# Altium PCB DMM6500 Scan card.PcbDoc (part 1 of 2)
Units mm, origin at the board's own origin, x right, y up, seen from the top; angles counter-clockwise.
Board outline 228.6 x 72.14 mm, 2 copper layers (Top Layer, Bottom Layer); 208 components, 132 nets, 652 pads, 172 vias.
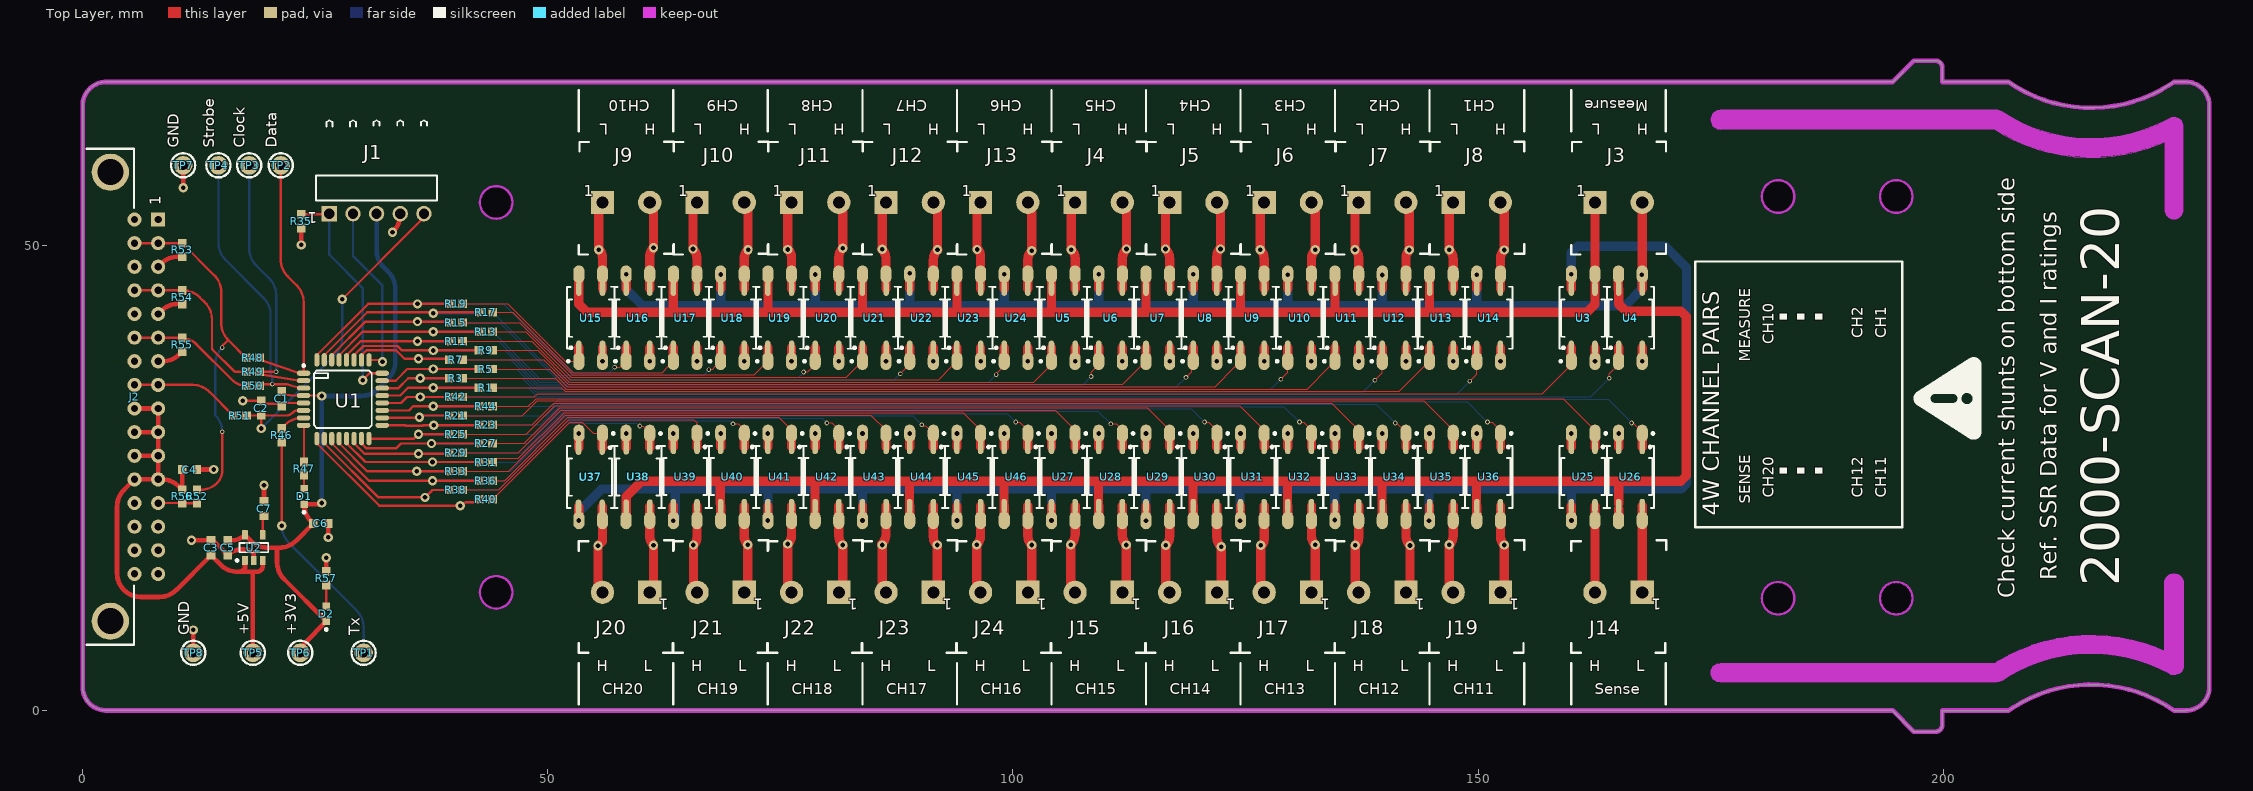
[diagram p0: Top Layer view]
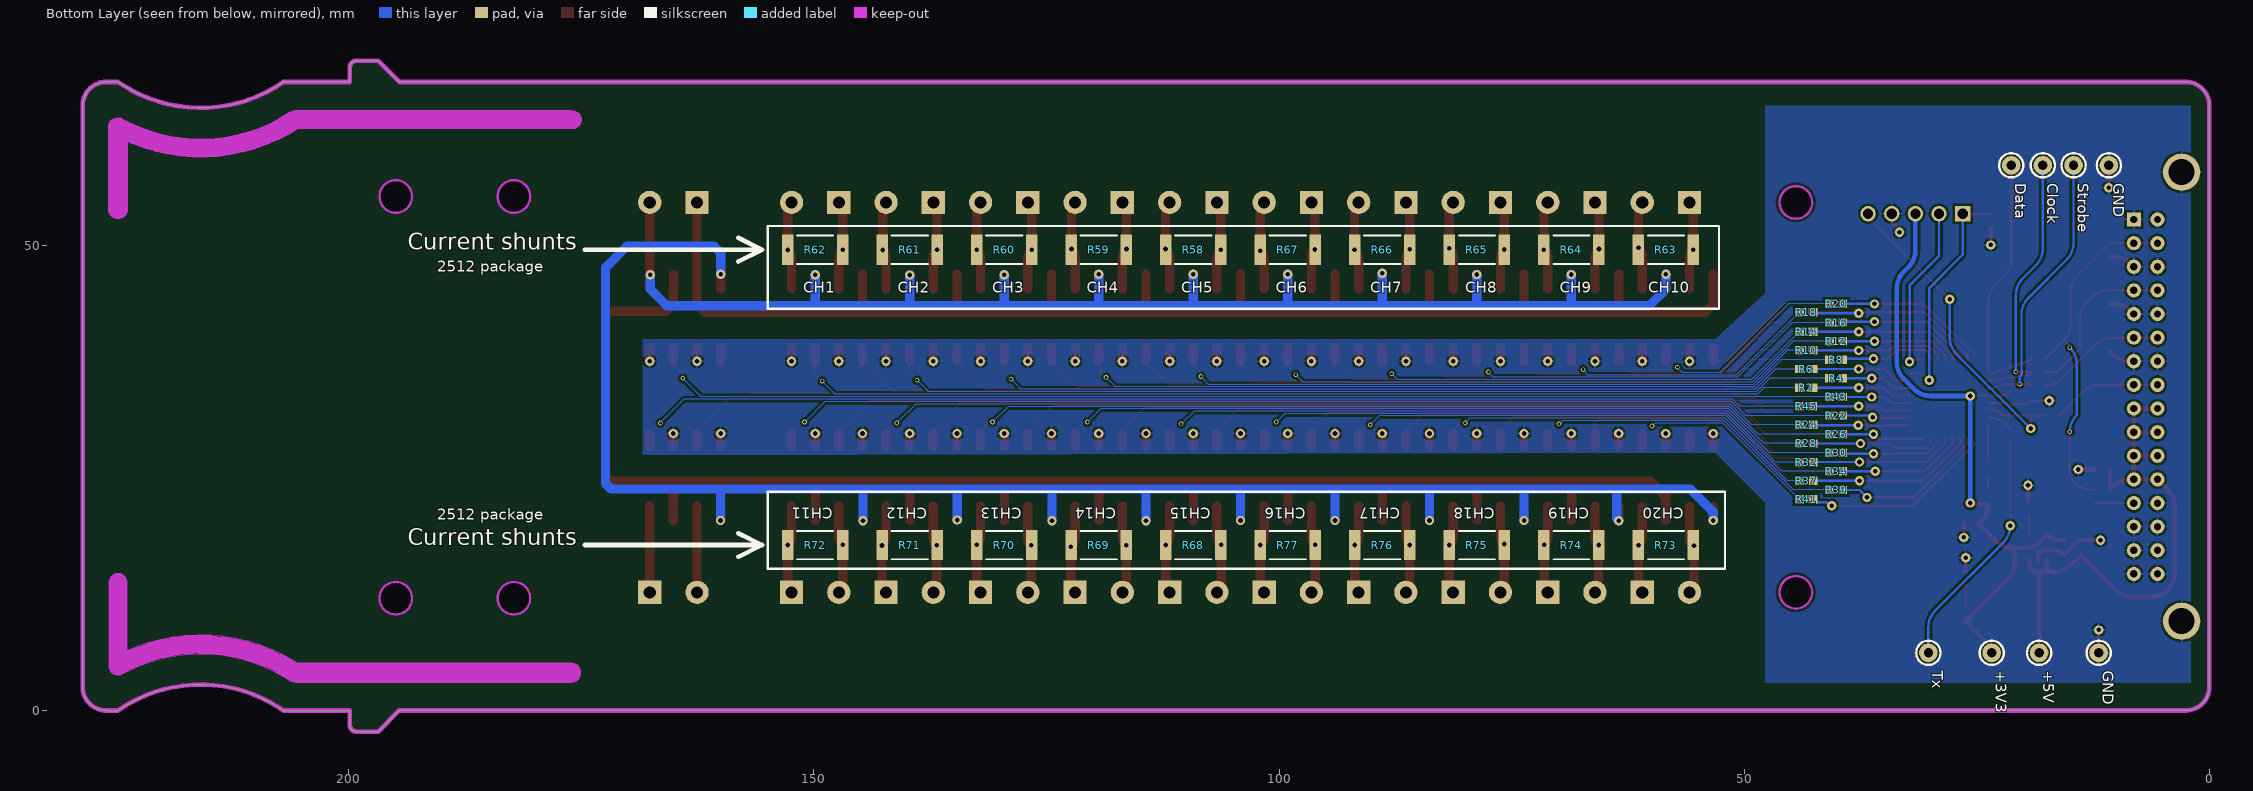
[diagram p1: Bottom Layer view, seen from below]

## Layer stack, top to bottom
Top Solder: solder mask 0.0102, Solder Resist, Dk 3.5
Top Layer: signal copper 0.0356
Dielectric 1: dielectric 0.32, FR-4, Dk 4.8
Bottom Layer: signal copper 0.0356
Bottom Solder: solder mask 0.0102, Solder Resist, Dk 3.5

## Board outline
1.12,0.434 1.27,0.34 1.427,0.257 1.588,0.185 1.755,0.124 1.926,0.075 2.099,0.039 2.274,0.014 2.451,0.002 2.54,0 194.564,0 196.85,-2.286 199.136,-2.286 199.189,-2.284 199.242,-2.279 199.294,-2.269 199.346,-2.256 199.397,-2.24 199.446,-2.22 199.494,-2.197 199.54,-2.17 199.584,-2.14 199.626,-2.108 199.665,-2.072 199.702,-2.034 199.736,-1.993 199.768,-1.95 199.796,-1.905 199.821,-1.858 199.843,-1.809 199.861,-1.759 199.875,-1.708 199.886,-1.656 199.894,-1.604 199.898,-1.551 199.898,-1.524 199.898,-0.009 207.02,-0.009 207.422,0.262 208.351,0.822 209.316,1.316 210.314,1.742 211.339,2.097 212.386,2.38 213.45,2.589 214.527,2.723 215.61,2.782 216.694,2.765 217.775,2.672 218.847,2.504 219.904,2.262 220.942,1.947 221.955,1.56 222.939,1.104 223.889,0.58 224.8,-0.009 226.07,-0.009 226.06,0 226.237,0.006 226.413,0.025 226.588,0.056 226.76,0.098 226.929,0.153 227.093,0.22 227.252,0.297 227.406,0.386 227.553,0.485 227.693,0.594 227.824,0.713 227.948,0.84 228.062,0.976 228.166,1.12 228.26,1.27 228.343,1.427 228.415,1.588 228.476,1.755 228.525,1.926 228.561,2.099 228.586,2.274 228.598,2.451 228.6,2.54 228.6,65.024 228.594,65.201 228.575,65.377 228.544,65.552 228.502,65.724 228.447,65.893 228.38,66.057 228.303,66.216 228.214,66.37 228.115,66.517 228.006,66.657 227.887,66.788 227.76,66.912 227.624,67.026 227.48,67.13 227.33,67.224 227.173,67.307 227.011,67.379 226.845,67.44 226.674,67.489 226.501,67.525 226.326,67.55 226.149,67.562 226.06,67.564 224.79,67.564 224.388,67.293 223.459,66.732 222.494,66.238 221.496,65.812 220.471,65.457 219.424,65.175 218.359,64.966 217.283,64.832 216.2,64.773 215.115,64.79 214.035,64.882 212.963,65.05 211.906,65.292 210.868,65.607 209.854,65.994 208.87,66.451 207.921,66.975 207.01,67.564 199.898,67.564 199.898,69.088 199.896,69.141 199.891,69.194 199.881,69.246 199.868,69.298 199.852,69.349 199.832,69.398 199.809,69.446 199.782,69.492 199.752,69.536 199.72,69.578 199.684,69.617 199.646,69.654 199.605,69.688 199.562,69.72 199.517,69.748 199.47,69.773 199.421,69.795 199.371,69.813 199.32,69.827 199.268,69.838 199.216,69.846 199.163,69.85 199.136,69.85 196.85,69.85 194.564,67.564 2.54,67.564 2.363,67.558 2.186,67.539 2.012,67.508 1.84,67.466 1.671,67.411 1.507,67.344 1.348,67.267 1.194,67.178 1.047,67.079 0.907,66.97 0.776,66.851 0.652,66.724 0.538,66.588 0.434,66.444 0.34,66.294 0.257,66.137 0.185,65.975 0.124,65.809 0.075,65.638 0.039,65.465 0.014,65.29 0.002,65.113 0,65.024 0,2.54 0.006,2.363 0.025,2.186 0.056,2.012 0.098,1.84 0.153,1.671 0.22,1.507 0.297,1.348 0.386,1.194 0.485,1.047 0.594,0.907 0.713,0.776 0.84,0.652 0.976,0.538
cut-out: 44.45,52.86 cw(c44.45,54.61) 42.7,54.61 cw(c44.45,54.61) 44.45,56.36 cw(c44.45,54.61) 46.2,54.61 cw(c44.45,54.61)
cut-out: 193.195,55.245 ccw(c194.945,55.245) 194.945,53.495 ccw(c194.945,55.245) 196.695,55.245 ccw(c194.945,55.245) 194.945,56.995 ccw(c194.945,55.245)
cut-out: 180.495,55.245 ccw(c182.245,55.245) 182.245,53.495 ccw(c182.245,55.245) 183.995,55.245 ccw(c182.245,55.245) 182.245,56.995 ccw(c182.245,55.245)
cut-out: 180.495,12.065 ccw(c182.245,12.065) 182.245,10.315 ccw(c182.245,12.065) 183.995,12.065 ccw(c182.245,12.065) 182.245,13.815 ccw(c182.245,12.065)
cut-out: 193.195,12.065 ccw(c194.945,12.065) 194.945,10.315 ccw(c194.945,12.065) 196.695,12.065 ccw(c194.945,12.065) 194.945,13.815 ccw(c194.945,12.065)
cut-out: 42.7,12.7 ccw(c44.45,12.7) 44.45,10.95 ccw(c44.45,12.7) 46.2,12.7 ccw(c44.45,12.7) 44.45,14.45 ccw(c44.45,12.7)
cut-out: 208.83,60.784 210.04,60.357 210.11,60.335 211.346,59.993 211.417,59.977 212.676,59.722 212.746,59.71 214.02,59.543 214.091,59.537 215.375,59.459 215.444,59.458 216.731,59.47 216.801,59.473 218.083,59.575 218.152,59.583 219.424,59.774 219.493,59.787 220.748,60.067 220.817,60.085 222.048,60.451 222.115,60.473 223.32,60.925 223.385,60.952 223.79,61.137 223.79,53.848 ccw(c224.79,53.848) 225.79,53.848 225.79,62.738 ccw(c224.79,62.738) 224.324,63.623 223.698,63.294 222.584,62.786 221.445,62.359 220.279,62.012 219.092,61.748 217.889,61.567 216.676,61.47 215.46,61.459 214.246,61.532 213.04,61.689 211.847,61.931 210.675,62.255 209.528,62.66 208.412,63.144 207.332,63.704 206.265,64.357 ccw(c205.743,63.504) 205.742,64.504 176.022,64.5 ccw(c176.022,63.5) 176.022,62.5 205.461,62.503 206.318,61.979 206.379,61.945 207.52,61.352 207.584,61.322
cut-out: 176.031,3.054 cw(c176.032,4.054) 176.032,5.055 205.463,5.051 205.84,5.289 205.887,5.318 207.01,5.944 207.072,5.976 208.237,6.523 208.301,6.55 209.5,7.015 209.566,7.038 210.795,7.417 210.864,7.436 212.115,7.728 212.185,7.742 213.453,7.946 213.523,7.955 214.804,8.071 214.874,8.075 216.16,8.101 216.23,8.1 217.515,8.036 217.584,8.03 218.861,7.877 218.932,7.866 220.192,7.624 220.263,7.608 221.504,7.279 221.572,7.259 222.789,6.843 222.855,6.818 223.799,6.421 223.799,13.706 cw(c224.8,13.706) 225.8,13.706 225.8,4.816 cw(c224.8,4.816) 224.347,3.924 223.231,4.489 222.11,4.961 220.959,5.354 219.783,5.666 218.588,5.894 217.381,6.039 216.166,6.1 214.949,6.075 213.738,5.966 212.537,5.772 211.352,5.495 210.19,5.136 209.056,4.697 207.954,4.18 206.886,3.584 206.287,3.205 cw(c205.752,4.051) 205.752,3.05

## Design rules (kind name [scope] priority, off if disabled: settings)
Clearance [All] p1: gap=0.254 ignorepadtopadclearanceinfootprint=FALSE except(0.127: Arc-Arc Arc-Track Track-Track SMDPad-SMDPad; 0.2: Arc-SMDPad Track-SMDPad)
ComponentClearance ComponentClearance_Conn [(HasFootprint('Phoenix Contact 1733570')) vs (HasFootprint('Phoenix Contact 1733570'))] p1: gap=0 collisioncheckmode=3 verticalgap=0 showdistances=FALSE
ComponentClearance ComponentClearance_General [All] p2: gap=0.254 collisioncheckmode=3 verticalgap=0.254 showdistances=FALSE
HoleSize [All] p1: absolutevalues=TRUE maxlimit=5 minlimit=0.025 maxpercent=80.000 minpercent=20.000
MinimumSolderMaskSliver [All] p1: minsoldermaskwidth=0
PolygonConnect [All] p1: connectstyle=Relief reliefconductorwidth=0.254 reliefentries=4 polygonreliefangle="90 Angle" airgapwidth=0.254
RoutingVias [All] p1: holewidth=0.5 width=1 viastyle="Through Hole" minholewidth=0.3 minwidth=0.5 maxholewidth=0.7 maxwidth=1.27
SilkToSilkClearance [All] p1: silktosilkclearance=0
SilkToSolderMaskClearance [IsPad] p1: minsilkscreentomaskgap=0.1 clearancetoexposedcopper=TRUE
SolderMaskExpansion SolderMaskExpansionVias [IsVia] p1: expansion=0.102 istentingtop=TRUE
SolderMaskExpansion [All] p2: expansion=0.102 istentingtop=FALSE
Width [All] p1: maxlimit=1 minlimit=0.127 preferedwidth=0.254 minimp=50.000000 maximp=50.000000 favimp=50.000000
25 further rules are at their usual default settings.

## Classes and differential pairs
component class "Scan card SSR": J3 J4 J5 J6 J7 J8 J9 J10 J11 J12 J13 J14 J15 J16 J17 J18 J19 J20 J21 J22 J23 J24 R58 R59 R60 R61 R62 R63 R64 R65 R66 R67 R68 R69 R70 R71 R72 R73 R74 R75 R76 R77 U3 U4 U5 U6 U7 U8 U9 U10 U11 U12 U13 U14 U15 U16 U17 U18 U19 U20 U21 U22 U23 U24 U25 U26 U27 U28 U29 U30 U31 U32 U33 U34 U35 U36 U37 U38 U39 U40 U41 U42 U43 U44 U45 U46
component class "Scan card MCU&Power": C1 C2 C3 C4 C5 C6 C7 D1 D2 J1 J2 R1 R2 R3 R4 R5 R6 R7 R8 R9 R10 R11 R12 R13 R14 R15 R16 R17 R18 R19 R20 R21 R22 R23 R24 R25 R26 R27 R28 R29 R30 R31 R32 R33 R34 R35 R36 R37 R38 R39 R40 R41 R42 R43 R44 R45 R46 R47 R48 R49 R50 R51 R52 R53 R54 R55 R56 R57 TP1 TP2 TP3 TP4 TP5 TP6 TP7 TP8 U1 U2

## Components (designator, comment, footprint, x,y, rotation, side; value= is the part's Value field where it differs from the comment)
C1 "100n" CAPC1608X08N 21.4,33.5 r270 top
C2 "100n" CAPC1608X08N 19.2,32.5 r270 top
C3 "1u" CAPC1608X08N 13.8,17.5 r270 top
C4 "1u" CAPC1608X08N 11.5,25.9 r180 top
C5 "1u" CAPC1608X08N 15.6,17.5 r90 top
C6 "1u" CAPC1608X08N 25.6,20.1 r180 top
C7 "100n" CAPC1608X08N 19.5,21.7 r270 top
D1 "0603" LED0603green 23.8,23 r270 top
D2 "0603" LED0603red 26.2,10.4 r270 top
J1 "61300511021" "WE 61300511021" 31.6,56.17 r180 top
J2 "85050-0000" "Molex 85050-0000" 5.515,33.725 r90 top
J3 "1733570" "Phoenix Contact 1733570" 165.1,54.61 r0 top
J4 "1733570" "Phoenix Contact 1733570" 109.22,54.61 r0 top
J5 "1733570" "Phoenix Contact 1733570" 119.38,54.61 r0 top
J6 "1733570" "Phoenix Contact 1733570" 129.54,54.61 r0 top
J7 "1733570" "Phoenix Contact 1733570" 139.7,54.61 r0 top
J8 "1733570" "Phoenix Contact 1733570" 149.86,54.61 r0 top
J9 "1733570" "Phoenix Contact 1733570" 58.42,54.61 r0 top
J10 "1733570" "Phoenix Contact 1733570" 68.58,54.61 r0 top
J11 "1733570" "Phoenix Contact 1733570" 78.74,54.61 r0 top
J12 "1733570" "Phoenix Contact 1733570" 88.9,54.61 r0 top
J13 "1733570" "Phoenix Contact 1733570" 99.06,54.61 r0 top
J14 "1733570" "Phoenix Contact 1733570" 165.1,12.7 r180 top
J15 "1733570" "Phoenix Contact 1733570" 109.22,12.7 r180 top
J16 "1733570" "Phoenix Contact 1733570" 119.38,12.7 r180 top
J17 "1733570" "Phoenix Contact 1733570" 129.54,12.7 r180 top
J18 "1733570" "Phoenix Contact 1733570" 139.7,12.7 r180 top
J19 "1733570" "Phoenix Contact 1733570" 149.86,12.7 r180 top
J20 "1733570" "Phoenix Contact 1733570" 58.42,12.7 r180 top
J21 "1733570" "Phoenix Contact 1733570" 68.58,12.7 r180 top
J22 "1733570" "Phoenix Contact 1733570" 78.74,12.7 r180 top
J23 "1733570" "Phoenix Contact 1733570" 88.9,12.7 r180 top
J24 "1733570" "Phoenix Contact 1733570" 99.06,12.7 r180 top
R1 "330 1%" RESC1608X06N 43.325,34.7 r0 top
R2 "330 1%" RESC1608X06N 43.325,34.7 r0 bottom
R3 "330 1%" RESC1608X06N 40.125,35.7 r0 top
R4 "330 1%" RESC1608X06N 40.125,35.7 r0 bottom
R5 "330 1%" RESC1608X06N 43.325,36.7 r0 top
R6 "330 1%" RESC1608X06N 43.325,36.7 r0 bottom
R7 "330 1%" RESC1608X06N 40.125,37.7 r0 top
R8 "330 1%" RESC1608X06N 40.125,37.7 r0 bottom
R9 "330 1%" RESC1608X06N 43.325,38.7 r0 top
R10 "330 1%" RESC1608X06N 43.325,38.7 r0 bottom
R11 "330 1%" RESC1608X06N 40.125,39.7 r0 top
R12 "330 1%" RESC1608X06N 40.125,39.7 r0 bottom
R13 "330 1%" RESC1608X06N 43.325,40.7 r0 top
R14 "330 1%" RESC1608X06N 43.325,40.7 r0 bottom
R15 "330 1%" RESC1608X06N 40.125,41.7 r0 top
R16 "330 1%" RESC1608X06N 40.125,41.7 r0 bottom
R17 "330 1%" RESC1608X06N 43.35,42.8 r0 top
R18 "330 1%" RESC1608X06N 43.325,42.8 r0 bottom
R19 "330 1%" RESC1608X06N 40.125,43.7 r0 top
R20 "330 1%" RESC1608X06N 40.125,43.7 r0 bottom
R21 "330 1%" RESC1608X06N 40.125,31.7 r0 top
R22 "330 1%" RESC1608X06N 40.125,31.7 r0 bottom
R23 "330 1%" RESC1608X06N 43.325,30.7 r0 top
R24 "330 1%" RESC1608X06N 43.325,30.7 r0 bottom
R25 "330 1%" RESC1608X06N 40.125,29.7 r0 top
R26 "330 1%" RESC1608X06N 40.125,29.7 r0 bottom
R27 "330 1%" RESC1608X06N 43.325,28.7 r0 top
R28 "330 1%" RESC1608X06N 43.325,28.7 r0 bottom
R29 "330 1%" RESC1608X06N 40.125,27.7 r0 top
R30 "330 1%" RESC1608X06N 40.125,27.7 r0 bottom
R31 "330 1%" RESC1608X06N 43.325,26.7 r0 top
R32 "330 1%" RESC1608X06N 43.325,26.7 r0 bottom
R33 "330 1%" RESC1608X06N 40.125,25.7 r0 top
R34 "330 1%" RESC1608X06N 40.125,25.7 r0 bottom
R35 "10k 1%" RESC1608X06N 23.5,52.6 r90 top
R36 "330 1%" RESC1608X06N 43.325,24.7 r0 top
R37 "330 1%" RESC1608X06N 43.325,24.7 r0 bottom
R38 "330 1%" RESC1608X06N 40.125,23.7 r0 top
R39 "330 1%" RESC1608X06N 40.125,23.7 r0 bottom
R40 "330 1%" RESC1608X06N 43.325,22.7 r0 top
R41 "330 1%" RESC1608X06N 43.325,22.7 r0 bottom
R42 "330 1%" RESC1608X06N 40.125,33.7 r0 top
R43 "330 1%" RESC1608X06N 40.125,33.7 r0 bottom
R44 "330 1%" RESC1608X06N 43.325,32.7 r0 top
R45 "330 1%" RESC1608X06N 43.35,32.7 r0 bottom
R46 "330 1%" RESC1608X06N 21.4,29.6 r270 top
R47 "330 1%" RESC1608X06N 23.8,26 r270 top
R48 "330 1%" RESC1608X06N 18.3,37.9 r0 top
R49 "330 1%" RESC1608X06N 18.3,36.4 r0 top
R50 "330 1%" RESC1608X06N 18.3,34.9 r0 top
R51 "330 1%" RESC1608X06N 16.9,31.7 r0 top
R52 "0 1%" RESC1608X06N 12.3,23 r90 top
R53 "10k 1%" RESC1608X06N 10.7,49.5 r90 top
R54 "10k 1%" RESC1608X06N 10.7,44.425 r90 top
R55 "10k 1%" RESC1608X06N 10.7,39.3 r90 top
R56 "0 1%" RESC1608X06N 10.7,23 r270 top
R57 "330 1%" RESC1608X06N 26.2,14.2 r270 top
R58 "? 1%" RESC6431X06N 109.22,49.53 r0 bottom
R59 "? 1%" RESC6431X06N 119.38,49.53 r0 bottom
R60 "? 1%" RESC6431X06N 129.54,49.53 r0 bottom
R61 "? 1%" RESC6431X06N 139.7,49.53 r0 bottom
R62 "? 1%" RESC6431X06N 149.86,49.53 r0 bottom
R63 "? 1%" RESC6431X06N 58.42,49.53 r0 bottom
R64 "? 1%" RESC6431X06N 68.58,49.53 r0 bottom
R65 "? 1%" RESC6431X06N 78.74,49.53 r0 bottom
R66 "? 1%" RESC6431X06N 88.9,49.53 r0 bottom
R67 "? 1%" RESC6431X06N 99.06,49.53 r0 bottom
R68 "? 1%" RESC6431X06N 109.22,17.78 r0 bottom
R69 "? 1%" RESC6431X06N 119.38,17.78 r0 bottom
R70 "? 1%" RESC6431X06N 129.54,17.78 r0 bottom
R71 "? 1%" RESC6431X06N 139.7,17.78 r0 bottom
R72 "? 1%" RESC6431X06N 149.86,17.78 r0 bottom
R73 "? 1%" RESC6431X06N 58.42,17.78 r0 bottom
R74 "? 1%" RESC6431X06N 68.58,17.78 r0 bottom
R75 "? 1%" RESC6431X06N 78.74,17.78 r0 bottom
R76 "? 1%" RESC6431X06N 88.9,17.78 r0 bottom
R77 "? 1%" RESC6431X06N 99.06,17.78 r0 bottom
TP1 "Tx" TP_ROUND_20_10 30.2,6.2 r90 top
TP2 "Data" TP_ROUND_20_10 21.3,58.6 r90 top
TP3 "Clock" TP_ROUND_20_10 17.9,58.6 r90 top
TP4 "Strobe" TP_ROUND_20_10 14.6,58.6 r90 top
TP5 "+5V" TP_ROUND_20_10 18.3,6.2 r90 top
TP6 "+3V3" TP_ROUND_20_10 23.4,6.2 r90 top
TP7 "GND" TP_ROUND_20_10 10.8,58.6 r90 top
TP8 "GND" TP_ROUND_20_10 11.9,6.2 r90 top
U1 "STM32G070KBT6" LQFP80P900X900X160-32N 27.975,33.45 r0 top
U2 "TPS73233DBVR" SOT23-5-095_N 18.4,17.5 r90 top
U3 "VOR1142M4" SOP254P700X232-4N 161.29,42.164 r90 top
U3 "VOR1142B4" SOP254P1000X380-4N 161.29,42.21 r90 top
U4 "VOR1142M4" SOP254P700X232-4N 166.37,42.164 r90 top
U4 "VOR1142B4" SOP254P1000X380-4N 166.37,42.21 r90 top
U5 "VOR1142M4" SOP254P700X232-4N 105.41,42.164 r90 top
U5 "VOR1142B4" SOP254P1000X380-4N 105.41,42.21 r90 top
U6 "VOR1142M4" SOP254P700X232-4N 110.49,42.164 r90 top
U6 "VOR1142B4" SOP254P1000X380-4N 110.49,42.21 r90 top
U7 "VOR1142M4" SOP254P700X232-4N 115.57,42.164 r90 top
U7 "VOR1142B4" SOP254P1000X380-4N 115.57,42.21 r90 top
U8 "VOR1142M4" SOP254P700X232-4N 120.65,42.164 r90 top
U8 "VOR1142B4" SOP254P1000X380-4N 120.65,42.21 r90 top
U9 "VOR1142M4" SOP254P700X232-4N 125.73,42.164 r90 top
U9 "VOR1142B4" SOP254P1000X380-4N 125.73,42.21 r90 top
U10 "VOR1142M4" SOP254P700X232-4N 130.81,42.164 r90 top
U10 "VOR1142B4" SOP254P1000X380-4N 130.81,42.21 r90 top
U11 "VOR1142M4" SOP254P700X232-4N 135.89,42.164 r90 top
U11 "VOR1142B4" SOP254P1000X380-4N 135.89,42.21 r90 top
U12 "VOR1142M4" SOP254P700X232-4N 140.97,42.164 r90 top
U12 "VOR1142B4" SOP254P1000X380-4N 140.97,42.21 r90 top
U13 "VOR1142M4" SOP254P700X232-4N 146.05,42.164 r90 top
U13 "VOR1142B4" SOP254P1000X380-4N 146.05,42.21 r90 top
U14 "VOR1142M4" SOP254P700X232-4N 151.13,42.164 r90 top
U14 "VOR1142B4" SOP254P1000X380-4N 151.13,42.21 r90 top
U15 "VOR1142M4" SOP254P700X232-4N 54.61,42.164 r90 top
U15 "VOR1142B4" SOP254P1000X380-4N 54.61,42.21 r90 top
U16 "VOR1142M4" SOP254P700X232-4N 59.69,42.164 r90 top
U16 "VOR1142B4" SOP254P1000X380-4N 59.69,42.21 r90 top
U17 "VOR1142M4" SOP254P700X232-4N 64.77,42.164 r90 top
U17 "VOR1142B4" SOP254P1000X380-4N 64.77,42.21 r90 top
U18 "VOR1142M4" SOP254P700X232-4N 69.85,42.164 r90 top
U18 "VOR1142B4" SOP254P1000X380-4N 69.85,42.21 r90 top
U19 "VOR1142M4" SOP254P700X232-4N 74.93,42.164 r90 top
U19 "VOR1142B4" SOP254P1000X380-4N 74.93,42.21 r90 top
U20 "VOR1142M4" SOP254P700X232-4N 80.01,42.164 r90 top
U20 "VOR1142B4" SOP254P1000X380-4N 80.01,42.21 r90 top
U21 "VOR1142M4" SOP254P700X232-4N 85.09,42.164 r90 top
U21 "VOR1142B4" SOP254P1000X380-4N 85.09,42.21 r90 top
U22 "VOR1142M4" SOP254P700X232-4N 90.17,42.164 r90 top
U22 "VOR1142B4" SOP254P1000X380-4N 90.17,42.21 r90 top
U23 "VOR1142M4" SOP254P700X232-4N 95.25,42.164 r90 top
U23 "VOR1142B4" SOP254P1000X380-4N 95.25,42.21 r90 top
U24 "VOR1142M4" SOP254P700X232-4N 100.33,42.164 r90 top
U24 "VOR1142B4" SOP254P1000X380-4N 100.33,42.21 r90 top
U25 "VOR1142M4" SOP254P700X232-4N 161.29,25.146 r270 top
U25 "VOR1142B4" SOP254P1000X380-4N 161.29,25.1 r270 top
U26 "VOR1142M4" SOP254P700X232-4N 166.37,25.146 r270 top
U26 "VOR1142B4" SOP254P1000X380-4N 166.37,25.1 r270 top
U27 "VOR1142M4" SOP254P700X232-4N 105.41,25.146 r270 top
U27 "VOR1142B4" SOP254P1000X380-4N 105.41,25.1 r270 top
U28 "VOR1142M4" SOP254P700X232-4N 110.49,25.146 r270 top
U28 "VOR1142B4" SOP254P1000X380-4N 110.49,25.1 r270 top
U29 "VOR1142M4" SOP254P700X232-4N 115.57,25.146 r270 top
U29 "VOR1142B4" SOP254P1000X380-4N 115.57,25.1 r270 top
U30 "VOR1142M4" SOP254P700X232-4N 120.65,25.146 r270 top
U30 "VOR1142B4" SOP254P1000X380-4N 120.65,25.1 r270 top
U31 "VOR1142M4" SOP254P700X232-4N 125.73,25.146 r270 top
U31 "VOR1142B4" SOP254P1000X380-4N 125.73,25.1 r270 top
U32 "VOR1142M4" SOP254P700X232-4N 130.81,25.146 r270 top
U32 "VOR1142B4" SOP254P1000X380-4N 130.81,25.1 r270 top
U33 "VOR1142M4" SOP254P700X232-4N 135.89,25.146 r270 top
U33 "VOR1142B4" SOP254P1000X380-4N 135.89,25.1 r270 top
U34 "VOR1142M4" SOP254P700X232-4N 140.97,25.146 r270 top
U34 "VOR1142B4" SOP254P1000X380-4N 140.97,25.1 r270 top
U35 "VOR1142M4" SOP254P700X232-4N 146.05,25.146 r270 top
U35 "VOR1142B4" SOP254P1000X380-4N 146.05,25.1 r270 top
U36 "VOR1142M4" SOP254P700X232-4N 151.13,25.146 r270 top
U36 "VOR1142B4" SOP254P1000X380-4N 151.13,25.1 r270 top
U37 "VOR1142M4" SOP254P700X232-4N 54.57,25.075 r270 top
U37 "VOR1142B4" SOP254P1000X380-4N 54.61,25.1 r270 top
U38 "VOR1142M4" SOP254P700X232-4N 59.7,25.1 r270 top
U38 "VOR1142B4" SOP254P1000X380-4N 59.69,25.1 r270 top
U39 "VOR1142M4" SOP254P700X232-4N 64.77,25.146 r270 top
U39 "VOR1142B4" SOP254P1000X380-4N 64.77,25.1 r270 top
U40 "VOR1142M4" SOP254P700X232-4N 69.85,25.146 r270 top
U40 "VOR1142B4" SOP254P1000X380-4N 69.85,25.1 r270 top
U41 "VOR1142M4" SOP254P700X232-4N 74.93,25.146 r270 top
U41 "VOR1142B4" SOP254P1000X380-4N 74.93,25.1 r270 top
U42 "VOR1142M4" SOP254P700X232-4N 80.01,25.146 r270 top
U42 "VOR1142B4" SOP254P1000X380-4N 80.01,25.1 r270 top
U43 "VOR1142M4" SOP254P700X232-4N 85.09,25.146 r270 top
U43 "VOR1142B4" SOP254P1000X380-4N 85.09,25.1 r270 top
U44 "VOR1142M4" SOP254P700X232-4N 90.17,25.146 r270 top
U44 "VOR1142B4" SOP254P1000X380-4N 90.17,25.1 r270 top
U45 "VOR1142M4" SOP254P700X232-4N 95.25,25.146 r270 top
U45 "VOR1142B4" SOP254P1000X380-4N 95.25,25.1 r270 top
U46 "VOR1142M4" SOP254P700X232-4N 100.33,25.146 r270 top
U46 "VOR1142B4" SOP254P1000X380-4N 100.33,25.1 r270 top

## Footprints (in the part's own frame and the unit in brackets; to place one, negate y for a bottom-side part, rotate by r counter-clockwise, add the part's x,y. Pads: shape width x height; smd on the part's side, far side on the other; paste and mask are expansions set on the pad)
CAPC1608X08N [mm] "0603"
  rect 0.9x0.95 smd: 1(-0.8,0) 2(0.8,0)
  body extent -0.85,-0.45 0.85,0.45, height 0.8
LED0603green [mm]
  rect 0.8x0.8 smd paste+0 mask+0: 1(-0.825,0) 2(0.825,0)
  silkscreen extent -0.05,-0.45 1.82,0.45, body extent -0.8,-0.4 0.8,0.4, height 0.85
LED0603red [mm]
  rect 0.8x0.8 smd paste+0 mask+0: 1(-0.825,0) 2(0.825,0)
  silkscreen extent -0.05,-0.45 1.82,0.45, body extent -0.8,-0.4 0.8,0.4, height 0.85
LQFP80P900X900X160-32N [mm] "LQFP, 32-Leads, Body 9.00x9.00mm, Pitch 0.80mm, IPC Medium Density"
  oval 1.45x0.55 smd: 1(-4.225,2.8) 2(-4.225,2) 3(-4.225,1.2) 4(-4.225,0.4) 5(-4.225,-0.4) 6(-4.225,-1.2) 7(-4.225,-2) 8(-4.225,-2.8) 17(4.225,-2.8) 18(4.225,-2) 19(4.225,-1.2) 20(4.225,-0.4) 21(4.225,0.4) 22(4.225,1.2) 23(4.225,2) 24(4.225,2.8)
  oval 0.55x1.45 smd: 9(-2.8,-4.225) 10(-2,-4.225) 11(-1.2,-4.225) 12(-0.4,-4.225) 13(0.4,-4.225) 14(1.2,-4.225) 15(2,-4.225) 16(2.8,-4.225) 25(2.8,4.225) 26(2,4.225) 27(1.2,4.225) 28(0.4,4.225) 29(-0.4,4.225) 30(-1.2,4.225) 31(-2,4.225) 32(-2.8,4.225)
  silkscreen extent -4.35,-3.1 3.1,3.75, body extent -4.6,-4.6 4.6,4.6, height 1.55
"Molex 85050-0000" [mm] "2.54mm Pitch DIN 41612 Receptacle, Style Q/2 Reverse, 32 Circuits"
  rect 1.524x1.524 hole 0.8: A1(19.05,-2.6)
  round 1.524 hole 0.8: A2(16.51,-2.6) A3(13.97,-2.6) A4(11.43,-2.6) A5(8.89,-2.6) A6(6.35,-2.6) A7(3.81,-2.6) A8(1.27,-2.6) A9(-1.27,-2.6) A10(-3.81,-2.6) A11(-6.35,-2.6) A12(-8.89,-2.6) A13(-11.43,-2.6) A14(-13.97,-2.6) A15(-16.51,-2.6) A16(-19.05,-2.6) B1(19.05,-0.06) B2(16.51,-0.06) B3(13.97,-0.06) B4(11.43,-0.06) B5(8.89,-0.06) B6(6.35,-0.06) B7(3.81,-0.06) B8(1.27,-0.06) B9(-1.27,-0.06) B10(-3.81,-0.06) B11(-6.35,-0.06) B12(-8.89,-0.06) B13(-11.43,-0.06) B14(-13.97,-0.06) B15(-16.51,-0.06) B16(-19.05,-0.06)
  round 4 hole 2.8: MP1(-24.13,2.54) MP2(24.13,2.54)
  silkscreen extent -26.67,0 26.67,5.08, body extent -26.68,-2.73 26.68,12.6, height 7
"Phoenix Contact 1733570" [mm] "PCB terminal block - SMKDSP 1,5/ 2-5,08"
  rect 2.5x2.5 hole 1.3: 1(-2.54,0)
  round 2.5 hole 1.3: 2(2.54,0)
  silkscreen extent -5.11,-5.6 5.1,6.51, body extent -5.05,-7 5.85,6.4, height 15.3
RESC1608X06N [mm] "0603"
  rect 0.95x0.9 smd: 1(-0.725,0) 2(0.725,0)
  body extent -0.85,-0.45 0.85,0.45, height 0.55
RESC6431X06N [mm] "2512"
  rect 1.25x3.25 smd: 1(-2.95,0) 2(2.95,0)
  silkscreen extent -1.95,-1.52 1.95,1.53, body extent -3.22,-1.63 3.22,1.63, height 0.65
SOP254P700X232-4N [mm] "SOP, 4-Leads, Body 4.42x4.57mm, Pitch 2.54mm, IPC Medium Density"
  oval 1.55x0.6 smd: 1(-3.175,1.27) 2(-3.175,-1.27) 3(3.175,-1.27) 4(3.175,1.27)
  silkscreen extent -3.3,-2.35 2,2.35, body extent -3.47,-2.35 3.47,2.35, height 2.32
SOP254P1000X380-4N [mm] "SOP, 4-Leads, Body 4.89x6.65mm, Pitch 2.54mm, IPC Medium Density"
  oval 1.9x1.2 smd: 1(-4.675,1.27) 2(-4.675,-1.27) 3(4.675,-1.27) 4(4.675,1.27)
  silkscreen extent -4.8,-2.55 3.33,2.55, body extent -5.01,-2.35 5.01,2.35, height 3.8
SOT23-5-095_N [mm] "SOT23, 5-Leads, Body 3.05x1.75mm, Pitch 0.95mm, IPC Medium Density"
  rrect17% 1x0.6 smd: 1(-1.375,0.95) 2(-1.375,0) 3(-1.375,-0.95) 4(1.375,-0.95) 5(1.375,0.95)
  silkscreen extent -1.5,-1.55 0.5,1.92, body extent -1.42,-1.46 1.42,1.46, height 1.08
TP_ROUND_20_10 [mm] "*"
  round 2 hole 1: 1(0,0)
  silkscreen extent -1.3,-1.3 1.3,1.3
"WE 61300511021" [mm] "Pin Header, pitch 2.54 mm, THT, Angled, single row, 5p"
  rect 1.65x1.65 hole 1.1: 1(5.08,2.77)
  round 1.65 hole 1.1: 2(2.54,2.77) 3(0,2.77) 4(-2.54,2.77) 5(-5.08,2.77)
  silkscreen extent -6.5,-7.27 6.5,1.35, body extent -6.35,-7.27 6.35,3.09, height 2.58

## Part data
C1 C2 C7: library part CC0603KRX7R9BB104, "Multilayer Ceramic Capacitor, CC Series, 0.1 - F, - 10%, X7R, 50 V, 0603 [1608 Metric]", Manufacturer=Yageo, Package (imperial)=0603, Package (metric)=1608, Voltage=50V, Accuracy=0.1, Capacitance=100n, ComponentLink1Description=Datasheet, ComponentLink1URL="Datasheets\Capacitors\Yageo X7R.pdf", Height=0.8mm, Material=X7R, Part Number=CC0603KRX7R9BB104, Pin Count=2
C3 C4 C5 C6: library part CC0603KRX7R7BB105, "0603 1 uF 16 V ±10 % Tolerance X7R SMT Multilayer Ceramic Capacitor", Manufacturer=Yageo, Package (imperial)=0603, Package (metric)=1608, Voltage=16V, Accuracy=0.1, Capacitance=1u, ComponentLink1Description=Datasheet, ComponentLink1URL="Datasheets\Capacitors\Yageo X7R.pdf", Height=0.8mm, Material=X7R, Part Number=CC0603KRX7R7BB105, Pin Count=3
D1: library part LED0603green, "Generic LED green 0603", Color=green, Package (metric)=1608, Package (imperial)=0603, Part Number=LED0603green
D2: library part LED0603red, "Generic LED red 0603", Color=red, Package (metric)=1608, Package (imperial)=0603, Part Number=LED0603red
J1: "single row, 5p", Manufacturer="Wurth Elektronik", ComponentLink1Description=Datasheet, ComponentLink1URL=https://www.we-online.com/catalog/en/PHD_2_54_THT_ANGLED_PIN_HEADER_6130XX11021, ComponentLink2Description=Drawing, ComponentLink2URL=Datasheets\Connectors\WE\61300511021_drawing.pdf, Desctiption="Pin Header, pitch 2.54 mm, THT, Angled, single row, 5p", Part Number=61300511021, Pin Count=5
J2: "32 pos. female connector DIN41612 style Q/2 + clip", Manufacturer=Molex, ComponentLink1Description=Datasheet, ComponentLink1URL=Datasheets\Connectors\Molex\850500000_datasheet.pdf, ComponentLink2Description=Drawing, ComponentLink2URL=Datasheets\Connectors\Molex\850500000_drawing.pdf, ComponentLink3Description="3D Model", ComponentLink3URL="3D Models\Connectors\Molex\850500000.stp", Desctiption="2.54mm Pitch DIN 41612 Receptacle, Style Q/2 Reverse, 32 Circuits", Part Number=85050-0000, Pin Count=32
J3 J4 J5 J6 J7 J8 J9 J10 J11 J12 J13 J14 J15 J16 J17 J18 J19 J20 J21 J22 J23 J24: "single row, 2 pins", Manufacturer="Phoenix Contact", ComponentLink1Description="Technical drawing", ComponentLink1URL="Datasheets\Connectors\Phoenix Contact\1733570 technical drawing.pdf", Desctiption="PCB terminal block - SMKDSP 1,5/ 2-5,08", Part Number=1733570, Pin Count=2
R1 R2 R3 R4 R5 R6 R7 R8 R9 R10 R11 R12 R13 R14 R15 R16 R17 R18 R19 R20 R21 R22 R23 R24 R25 R26 R27 R28 R29 R30 R31 R32 R33 R34 R36 R37 R38 R39 R40 R41 R42 R43 R44 R45 R46 R47 R48 R49 R50 R51 R57: library part RC0603FR-07330RL, "YAGEO (PHYCOMP) - RC0603FR-07330RL - RES, THICK FILM, 330R, 1%, 0.1W, 0603", Manufacturer=Yageo, Package (imperial)=0603, Package (metric)=1608, Power=100mW, Resistance=330, Accuracy=1%, ComponentLink1Description=Datasheet, ComponentLink1URL="Datasheets\Resistors\Yageo 0603.pdf", Height=0.45mm, Part Number=RC0603FR-07330RL, Pin Count=2
R35 R53 R54 R55: library part RC0603FR-0710KL, "100mW 75V ±100ppm/℃ ±1% -55℃~+155℃ 10kΩ 0603 Chip Resistor - Surface Mount ROHS", Manufacturer=Yageo, Package (imperial)=0603, Package (metric)=1608, Power=100mW, Resistance=10k, Accuracy=1%, ComponentLink1Description=Datasheet, ComponentLink1URL="Datasheets\Resistors\Yageo 0603.pdf", Height=0.45mm, Part Number=RC0603FR-0710KL, Pin Count=2
R52 R56: library part RC0603FR-070RL, "RC Series 0603 0.1 W 0 Ohm Jumper Surface Mount Thick Film Chip Resistor", Manufacturer=Yageo, Package (imperial)=0603, Package (metric)=1608, Power=100mW, Resistance=0, Accuracy=1%, ComponentLink1Description=Datasheet, ComponentLink1URL="Datasheets\Resistors\Yageo 0603.pdf", Height=0.45mm, Part Number=RC0603FR-070RL, Pin Count=3
R58 R59 R60 R61 R62 R63 R64 R65 R66 R67 R68 R69 R70 R71 R72 R73 R74 R75 R76 R77: library part R2512X0.6mm_Generic, "Generic ? 1% 2512(6431)x0.6mm 1%", Manufacturer=Generic, Package (imperial)=2512, Package (metric)=6431, Power=1W, Resistance=?, Accuracy=1%, Height=0.6mm, Part Number=R2512X0.6mm_Generic, Pin Count=2
TP1 TP2 TP3 TP4 TP5 TP6 TP7 TP8: library part TP_ROUND_20_10, "Test point, round pad, 1 mm hole, 2 mm dia", Part Number=TP_ROUND_20_10
U1: "Arm® Cortex®-M0+ 32-bit MCU, 128 KB Flash, 36 KB RAM,  4x USART, timers, ADC, comm. I/Fs, 2.0-3.6V", Ambient Temperature Range High=+85°C, Ambient Temperature Range Low=-40°C, Frequency=64MHz, I/Os (High Current)=29, Manufacturer=STM, Max Junction Temp=+105°C, Max Supply Voltage=3.6V, Min Supply Voltage=2V, Nominal Supply Current=0.3-6.9mA, Operating Frequency(F) (Processor speed) (MHz)=64, Package=LQFP32-5V, Supply Voltage(Vcc) min (V)=2, Temperature="-40°C to +85°C", Automotive=No, Category=IC, ComponentLink1Description="Package Specification", ComponentLink1URL=https://www.st.com/resource/en/datasheet/stm32g070kb.pdf, ComponentLink2Description=Datasheet, ComponentLink2URL=https://www.st.com/resource/en/reference_manual/rm0454-stm32g0x0-advanced-armbased-32bit-mcus-stmicroelectronics.pdf, ComponentLink3Description="Manufacturer URL", ComponentLink3URL=https://www.st.com/en/microcontrollers-microprocessors/stm32g070kb.html#documentation, Core="ARM Cortex-M0+", Core Architecture="ARM Cortex-M0+", Data Bus Width=32bits, Device Class L1="Integrated Circuits (ICs)", Device Class L2="Embedded Processors and Controllers", Device Class L3=Microcontrollers, Digikey Description="MAINSTREAM VALUE LINE, ARM CORTE", FLASH Size (Prog) (kB)=128, Height=1.6mm, Interface=I2C,SPI,UART,USART,LIN,IrDA,I2S,SMBus,Other, Internal RAM Size (kB)=36, Ipc Land Pattern Name=QFP80P900X900X160-32, Lead Free=Yes, Manufacturer Part Number=STM32G070KBT6, Memory Size=128KBytes, Memory Type=FLASH, Mounting Technology="Surface Mount", Mouser Description="Cortex M0 128K LQFP32 85°C", Number Of A/D Converters=1, Number Of Adc Channels=13, Number Of Cores=1, Number Of I2C Channels=2, Number Of I/Os=29, Number Of Spi Channels=2, Number Of Timers/Counters=11, Number Of Uart Channels=4, Octopart=https://octopart.com/stm32g070kbt6-stmicroelectronics-97300430, PackageDescription="32-Pin Low Profile Quad Flat Package, 7 x 7 mm Body, 0.8 mm Pitch", PackageReference=LQFP32, Part Number=STM32G070KBT6, Ram Size=36KBytes, RoHS=TRUE, Standoff Height=0.05mm, Temperature Range High=+85°C, Temperature Range Low=-40°C
U2: "Single Output Fast Transient Response LDO, 200 mA, Fixed 3.3 V Output, 1.7 to 5.5 V Input, with Reverse Current Protection, 5-pin SOT-23 (DBV), -40 to 85 degC, Green (RoHS & no Sb/Br)", Manufacturer="Texas Instruments", Accuracy(%)=1, Code_JEDEC=MO-178, ComponentLink1Description=Datasheet, ComponentLink1URL="Datasheets\LDO Regulators\tps732.pdf", ComponentLink2Description=Datasheet, ComponentLink2URL=http://www.ti.com/general/docs/lit/getliterature.tsp?genericPartNumber=TPS73233&fileType=pdf, ComponentLink3Description="Package Specification", ComponentLink3URL=http://www.ti.com/litv/pdf/mpds018i, DatasheetVersion=SBVS037O, Eco-Plan="Green (RoHS & no Sb/Br)", Fixed Output Options(V)=3.3, Iout(Max)(A)=0.25, Iq(Typ)(mA)=0.4, Mounting Technology="Surface Mount", PackageDescription="5-Pin Plastic Small Outline, Body 1.60 Ãƒâ€” 2.90 mm, Pitch 0.95 mm", PackageReference=DBV0005A, PackageVersion=4073253-4/K, Part Number=TPS73233DBVR, PartNumber=TPS73233DBVR, Pin Count=5, SubFamily="Single Channel LDO", Vdo(Typ)(mV)=40, Vin(Max)(V)=5.5, Vin(Min)(V)=1.7, Vout Adj(Max)(V)=3.3, Vout Adj(Min)(V)=3.3
U3 U4 U5 U6 U7 U8 U9 U10 U11 U12 U13 U14 U15 U16 U17 U18 U19 U20 U21 U22 U23 U24 U25 U26 U27 U28 U29 U30 U31 U32 U33 U34 U35 U36 U37 U38 U39 U40 U41 U42 U43 U44 U45 U46: "Relay Ssr 2MA 1.5V Dc-in 0.14A 400V Dc-out 4-PIN DIP SMD T/r"
U3 U4 U5 U6 U7 U8 U9 U10 U11 U12 U13 U14 U15 U16 U17 U18 U19 U20 U21 U22 U23 U24 U25 U26 U27 U28 U29 U30 U31 U32 U33 U34 U35 U36 U37 U38 U39 U40 U41 U42 U43 U44 U45 U46: "Relay Ssr 2MA 1.5V Dc-in 0.14A 400V Dc-out 4-PIN DIP SMD T/r", Current=140mA, Manufacturer=Vishay, On-State Resistance=27R, Package=SOP-4, Voltage=400V, Part Number=VOR1142B4

## Via types
v1: diameter 1, hole 0.5, Top Layer to Bottom Layer, tented both sides, 146 vias
v2: diameter 0.5, hole 0.3, Top Layer to Bottom Layer, tented both sides, 26 vias

## Nets (pads, with @x,y where several pads share a name; then routed paths per layer and width w, separated by ;. In a path a pad name is that pad's centre, name@x,y a point inside that pad or via, vN(x,y) a via of type N, cw(c..) or ccw(c..) an arc to the next point about the centre after c; other vN are vias at no path point)
+3V3: C1.1 C5.2 C6.2 D1.2 D2.2 J1.3 TP6.1 U1.4 U2.5 | length 71.9
  Top Layer w0.254: C1.1@21.4,34.3 ccw(c22.486,35.386) 22.486,33.85 U1.4@23.75,33.85 25.579,33.85 cw(c25.579,33.679) v1(25.7,33.8)
  Top Layer w0.5: C5.2@15.6,18.3 16.062,18.3 ccw(c16.062,20.263) U2.5@17.45,18.875 18.081,18.244 ccw(c19.877,20.04) 19.877,17.5 20.9,17.5 ; TP6.1@23.4,6.2 cw(c24.788,6.2) 23.807,7.182 D2.2@26.2,9.575 21.644,14.131 cw(c23.44,15.927) 20.9,15.927 20.9,17.5 ; v1(25.7,22.3) cw(c25.398,22.602) 25.398,22.175 D1.2@23.8,22.175 23.8,22.152 ccw(c26.34,22.152) 24.544,20.356 24.8,20.1 22.944,18.244 cw(c21.148,20.04) 21.148,17.5 20.9,17.5
  Bottom Layer w0.5: v1(25.7,22.3) v1(25.7,33.8) 29.948,33.8 ccw(c29.948,36.34) 31.744,34.544 32.856,35.656 ccw(c31.06,37.452) 33.6,37.452 33.6,45.348 ccw(c31.06,45.348) 32.856,47.144 32.344,47.656 cw(c34.14,49.452) 31.6,49.452 J1.3@31.6,53.4
+5V: C3.2 C4.2 J2.A9 J2.A10 J2.A11 J2.A12 J2.B9 J2.B10 J2.B11 J2.B12 R56.1 TP5.1 U2.1 U2.3 | length 64.6
  Top Layer w0.5: J2.B11@5.575,27.375 J2.A11@8.115,27.375 ; J2.B10@5.575,29.915 J2.A10@8.115,29.915 ; J2.B9@5.575,32.455 J2.A9@8.115,32.455 J2.A10@8.115,29.915 ; C4.2@10.7,25.9 R56.1@10.7,23.725 10.334,24.091 ccw(c8.538,22.295) 8.538,24.835 J2.A12@8.115,24.835 ; U2.1@17.45,16.125 17.45,15.321 cw(c17.279,15.321) 17.4,15.2 cw(c16.676,15.924) 16.676,14.9 ; TP5.1@18.3,6.2 18.3,14.659 ccw(c17.959,14.659) 18.2,14.9 ; U2.3@19.35,16.125 19.35,15.462 cw(c18.838,15.462) 19.2,15.1 cw(c18.717,15.583) 18.717,14.9 18.2,14.9 ; J2.A12@8.115,24.835 J2.A11@8.115,27.375 ; J2.A12@8.115,24.835 J2.B12@5.575,24.835 4.444,23.704 ccw(c6.24,21.908) 3.7,21.908 3.7,14.752 ccw(c6.24,14.752) 4.444,12.956 4.456,12.944 ccw(c6.252,14.74) 6.252,12.2 8.248,12.2 ccw(c8.248,14.74) 10.044,12.944 C3.2@13.8,16.7 14.856,15.644 ccw(c16.652,17.44) 16.652,14.9 16.676,14.9 ; J2.A11@8.115,27.375 J2.A10@8.115,29.915 ; 16.676,14.9 18.2,14.9
Bus2_Hi: U3.4 U25.3 U27.3 U29.3 U31.3 U33.3 U35.3 U37.3 U39.3 U41.3 U43.3 U45.3 | length 213.2
  Top Layer w1: U37.3@53.3,21.9 53.32,21.88 53.32,20.445 v1(53.34,20.425) ; v1(63.5,20.4) U39.3@63.5,20.425 U39.3@63.5,21.971 ; v1(73.66,20.425) U41.3@73.66,21.971 ; U43.3@83.82,21.971 U43.3@83.82,20.425 ; U45.3@93.98,21.971 U45.3@93.98,20.425 ; v1(104.14,20.425) U27.3@104.14,21.971 ; U29.3@114.3,21.971 U29.3@114.3,20.425 ; v1(124.4,20.4) 124.46,20.46 U31.3@124.46,21.971 ; U33.3@134.62,20.425 cw(c134.668,20.473) v1(134.6,20.473) 134.62,20.493 U33.3@134.62,21.971 ; U35.3@144.78,20.425 cw(c144.72,20.485) v1(144.72,20.4) 144.78,20.46 U35.3@144.78,21.971 ; U25.3@160.02,21.971 160.02,20.445 v1(160.04,20.425) ; U3.4@160.02,45.339 160.02,46.88 v1(160.015,46.885) U3.4@160.02,46.885 ; U43.3@83.82,20.425 83.82,20.42 U43.3@83.82,20.425 ; U45.3@93.98,20.425 v1(93.98,20.42) U45.3@93.98,20.425 ; U29.3@114.3,20.425 v1(114.3,20.4) U29.3@114.3,20.425
  Bottom Layer w1: v1(53.34,20.425) 53.34,21.34 55.8,23.8 63.7,23.8 ; v1(63.5,20.4) 63.7,20.6 63.7,23.8 ; v1(73.66,20.425) 73.66,23.76 73.7,23.8 ; v1(83.82,20.42) 83.82,23.72 83.9,23.8 ; v1(93.98,20.42) 93.98,23.78 94,23.8 ; v1(104.14,20.425) 104.14,23.76 104.1,23.8 ; v1(114.3,20.4) 114.3,23.7 114.4,23.8 ; v1(124.4,20.4) 124.4,23.8 ; v1(134.6,20.473) 134.6,23.8 ; v1(144.72,20.4) 144.72,23.72 144.8,23.8 ; v1(160.015,46.885) 160.015,49.215 160.7,49.9 170.1,49.9 172.4,47.6 172.4,24.386 171.814,23.8 160.04,23.8 ; v1(160.04,20.425) 160.04,23.8 ; 63.7,23.8 73.7,23.8 ; 73.7,23.8 83.9,23.8 ; 83.9,23.8 94,23.8 ; 94,23.8 104.1,23.8 ; 104.1,23.8 114.4,23.8 ; 114.4,23.8 124.4,23.8 134.6,23.8 ; 134.6,23.8 144.8,23.8 ; 144.8,23.8 160.04,23.8
Bus2_In_N: R43.2 U4.1 | length 127.8
  Top Layer w0.127: v2(164.1,35.7) 164.1,36.185 165.1,37.185 U4.1@165.1,37.535
  Top Layer w1: U4.1@165.1,37.535 U4.1@165.1,38.989
  Bottom Layer w0.127: R43.2@40.85,33.7 162.1,33.7 v2(164.1,35.7)
Bus2_In_P: R42.2 U3.1 | length 122.4
  Top Layer w0.127: R42.2@40.85,33.7 48.561,33.7 48.896,34.036 156.871,34.036 160.02,37.185 U3.1@160.02,37.535
  Top Layer w1: U3.1@160.02,37.535 U3.1@160.02,38.989
Bus2_In_uC: R42.1 R43.1 U1.20 | length 10.6
  Top Layer w0.254: U1.20@32.2,33.05 34.218,33.05 34.868,33.7 v1(36.3,33.7) R42.1@39.4,33.7
  Bottom Layer w0.254: v1(36.3,33.7) R43.1@39.4,33.7
Bus2_Lo: U4.4 U26.3 U28.3 U30.3 U32.3 U34.3 U36.3 U38.3 U40.3 U42.3 U44.3 U46.3 | length 185
  Top Layer w1: U38.3@58.42,20.425 58.43,20.435 U38.3@58.43,21.925 58.43,23.008 60.072,24.65 68.472,24.65 ; U40.3@68.552,22.246 68.552,24.57 68.472,24.65 ; U40.3@68.58,20.425 U40.3@68.58,21.971 ; U42.3@78.712,20.453 U42.3@78.712,21.943 ; U42.3@78.712,22.246 78.712,24.59 78.772,24.65 ; U44.3@88.872,22.246 88.872,24.65 ; U44.3@88.9,20.425 U44.3@88.9,21.971 ; U46.3@99.032,22.246 99.032,24.59 98.972,24.65 ; U46.3@99.06,20.425 U46.3@99.06,21.971 ; U28.3@109.192,22.246 109.192,24.63 109.172,24.65 ; U28.3@109.22,20.425 U28.3@109.22,21.971 ; U30.3@119.352,22.246 119.352,24.63 119.372,24.65 ; U30.3@119.38,20.425 U30.3@119.38,21.971 ; U32.3@129.512,22.246 129.512,24.59 129.572,24.65 ; U32.3@129.54,20.425 U32.3@129.54,21.971 ; U34.3@139.672,22.246 139.672,24.55 139.772,24.65 ; U34.3@139.7,20.425 U34.3@139.7,21.971 ; U36.3@149.832,22.246 149.832,24.61 149.872,24.65 ; U36.3@149.86,20.425 U36.3@149.86,21.971 ; U4.4@165.072,45.292 U4.4@165.072,46.857 ; U26.3@165.1,20.425 U26.3@165.1,21.696 ; U4.4@165.1,45.339 165.1,43.688 165.862,42.926 171.786,42.926 172.372,42.34 172.372,25.236 171.786,24.65 165.11,24.65 ; U26.3@165.11,22.246 165.11,24.65 ; 68.472,24.65 78.772,24.65 ; 78.772,24.65 88.872,24.65 ; 88.872,24.65 98.972,24.65 ; 98.972,24.65 109.172,24.65 ; 109.172,24.65 119.372,24.65 ; 119.372,24.65 129.572,24.65 ; 129.572,24.65 139.772,24.65 ; 139.772,24.65 149.872,24.65 ; 149.872,24.65 165.11,24.65
Bus2_Sense_N: R45.2 U26.1 | length 126.9
  Top Layer w0.127: v2(166.5,30.9) 166.601,30.9 167.64,29.861 U26.1@167.64,29.775
  Top Layer w1: U26.1@167.64,28.321 U26.1@167.64,29.775
  Bottom Layer w0.127: R45.2@44.075,32.7 50.483,32.7 51.215,33.432 163.968,33.432 v2(166.5,30.9)
Bus2_Sense_P: R44.2 U25.1 | length 122.1
  Top Layer w0.127: R44.2@44.05,32.7 47.92,32.7 48.748,33.528 159.157,33.528 162.56,30.125 U25.1@162.56,29.775
  Top Layer w1: U25.1@162.56,28.321 U25.1@162.56,29.775
Bus2_Sense_uC: R44.1 R45.1 U1.19 | length 15.5
  Top Layer w0.254: U1.19@32.2,32.25 35.068,32.25 35.518,32.7 v1(37.7,32.7) R44.1@42.6,32.7
  Bottom Layer w0.254: v1(37.7,32.7) R45.1@42.625,32.7
CH1_N: R2.2 U14.1 | length 109.8
  Top Layer w0.127: v2(149.1,35.4) 149.86,36.16 U14.1@149.86,37.535
  Top Layer w1: U14.1@149.86,37.535 U14.1@149.86,38.989
  Bottom Layer w0.127: R2.2@44.05,34.7 47.92,34.7 48.606,34.014 147.714,34.014 v2(149.1,35.4)
CH1_P: R1.2 U13.1 | length 103.7
  Top Layer w0.127: R1.2@44.05,34.7 51.467,34.7 51.878,34.29 141.535,34.29 144.225,36.98 144.284,36.98 144.78,37.475 U13.1@144.78,37.535
  Top Layer w1: U13.1@144.78,37.535 U13.1@144.78,38.989
CH1_uC: R1.1 R2.1 U1.21 | length 15.7
  Top Layer w0.254: U1.21@32.2,33.85 34.15,33.85 35,34.7 v1(37.7,34.7) R1.1@42.6,34.7
  Bottom Layer w0.254: v1(37.7,34.7) R2.1@42.6,34.7
CH2_N: R4.2 U12.1 | length 103
  Top Layer w0.127: v2(138.9,35.5) 139.7,36.3 U12.1@139.7,37.535
  Top Layer w1: U12.1@139.7,37.535 U12.1@139.7,38.989
  Bottom Layer w0.127: R4.2@40.85,35.7 47.279,35.7 48.711,34.268 137.668,34.268 v2(138.9,35.5)
CH2_P: R3.2 U11.1 | length 97
  Top Layer w0.127: R3.2@40.85,35.7 50.826,35.7 51.983,34.544 131.629,34.544 134.065,36.98 134.124,36.98 134.62,37.475 U11.1@134.62,37.535
  Top Layer w1: U11.1@134.62,37.535 U11.1@134.62,38.989
CH2_uC: R3.1 R4.1 U1.22 | length 10.7
  Top Layer w0.254: U1.22@32.2,34.65 33.95,34.65 35,35.7 v1(36.3,35.7) R3.1@39.4,35.7
  Bottom Layer w0.254: v1(36.3,35.7) R4.1@39.4,35.7
CH3_N: R6.2 U10.1 | length 89.8
  Top Layer w0.127: v2(128.8,35.6) 129.54,36.34 U10.1@129.54,37.535
  Top Layer w1: U10.1@129.54,37.535 U10.1@129.54,38.989
  Bottom Layer w0.127: R6.2@44.05,36.7 46.638,36.7 48.816,34.522 127.722,34.522 v2(128.8,35.6)
CH3_P: R5.2 U9.1 | length 83.8
  Top Layer w0.127: R5.2@44.05,36.7 50.186,36.7 52.088,34.798 121.723,34.798 123.905,36.98 123.964,36.98 124.46,37.475 U9.1@124.46,37.535
  Top Layer w1: U9.1@124.46,37.535 U9.1@124.46,38.989
CH3_uC: R5.1 R6.1 U1.23 | length 15.8
  Top Layer w0.254: U1.23@32.2,35.45 33.65,35.45 34.9,36.7 v1(37.7,36.7) R5.1@42.6,36.7
  Bottom Layer w0.254: v1(37.7,36.7) R6.1@42.6,36.7
CH4_N: R8.2 U8.1 | length 82.9
  Top Layer w0.127: v2(118.6,35.8) 119.194,36.394 119.194,37.349 U8.1@119.38,37.535
  Top Layer w1: U8.1@119.38,37.535 U8.1@119.38,38.989
  Bottom Layer w0.127: R8.2@40.85,37.7 45.997,37.7 48.921,34.776 117.576,34.776 v2(118.6,35.8)
CH4_P: R7.2 U7.1 | length 77.1
  Top Layer w0.127: R7.2@40.85,37.7 49.545,37.7 52.193,35.052 111.817,35.052 113.745,36.98 113.804,36.98 114.3,37.475 U7.1@114.3,37.535
  Top Layer w1: U7.1@114.3,37.535 U7.1@114.3,38.989
CH4_uC: R7.1 R8.1 U1.26 | length 13.9
  Top Layer w0.254: U1.26@29.975,37.675 29.975,38.176 30.526,38.727 33.673,38.727 34.6,37.8 v1(36.1,37.8) 39.3,37.8 R7.1@39.4,37.7
  Bottom Layer w0.254: v1(36.1,37.8) 39.3,37.8 R8.1@39.4,37.7
CH5_N: R10.2 U6.1 | length 69.7
  Top Layer w0.127: v2(108.4,35.9) 108.4,36.365 109.22,37.185 U6.1@109.22,37.535
  Top Layer w1: U6.1@109.22,37.535 U6.1@109.22,38.989
  Bottom Layer w0.127: R10.2@44.05,38.7 45.357,38.7 49.027,35.03 107.53,35.03 v2(108.4,35.9)
CH5_P: R9.2 U5.1 | length 64.1
  Top Layer w0.127: R9.2@44.05,38.7 48.904,38.7 52.298,35.306 102.261,35.306 104.14,37.185 U5.1@104.14,37.535
  Top Layer w1: U5.1@104.14,37.535 U5.1@104.14,38.989
CH5_uC: R9.1 R10.1 U1.27 | length 19.4
  Top Layer w0.254: U1.27@29.175,37.675 29.175,38.176 30.18,39.181 33.861,39.181 34.342,38.7 v1(37.7,38.7) R9.1@42.6,38.7
  Bottom Layer w0.254: v1(37.7,38.7) R10.1@42.6,38.7
CH6_N: R12.2 U24.1 | length 62.8
  Top Layer w0.127: v2(98.2,36.1) 98.2,36.201 99.06,37.061 U24.1@99.06,37.535
  Top Layer w1: U24.1@99.06,37.535 U24.1@99.06,38.989
  Bottom Layer w0.127: R12.2@40.85,39.7 44.716,39.7 49.132,35.284 97.384,35.284 v2(98.2,36.1)
CH6_P: R11.2 U23.1 | length 57.2
  Top Layer w0.127: R11.2@40.85,39.7 48.263,39.7 52.404,35.56 92.005,35.56 93.425,36.98 93.484,36.98 93.98,37.475 U23.1@93.98,37.535
  Top Layer w1: U23.1@93.98,37.535 U23.1@93.98,38.989
CH6_uC: R11.1 R12.1 U1.28 | length 15.6
  Top Layer w0.254: U1.28@28.375,37.675 28.375,38.176 29.899,39.7 v1(36,39.7) R11.1@39.4,39.7
  Bottom Layer w0.254: v1(36,39.7) R12.1@39.4,39.7
CH7_N: R14.2 U22.1 | length 49.5
  Top Layer w0.127: v2(87.9,36.2) 87.908,36.2 88.9,37.193 U22.1@88.9,37.535
  Top Layer w1: U22.1@88.9,37.535 U22.1@88.9,38.989
  Bottom Layer w0.127: R14.2@44.05,40.7 44.075,40.7 49.237,35.538 87.238,35.538 v2(87.9,36.2)
CH7_P: R13.2 U21.1 | length 44
  Top Layer w0.127: R13.2@44.05,40.7 47.622,40.7 52.509,35.814 82.099,35.814 83.265,36.98 83.324,36.98 83.82,37.475 U21.1@83.82,37.535
  Top Layer w1: U21.1@83.82,37.535 U21.1@83.82,38.989
CH7_uC: R13.1 R14.1 U1.29 | length 21.5
  Top Layer w0.254: U1.29@27.575,37.675 27.575,38.176 30.099,40.7 v1(37.7,40.7) R13.1@42.6,40.7
  Bottom Layer w0.254: v1(37.7,40.7) R14.1@42.6,40.7
CH8_N: R16.2 U20.1 | length 42.8
  Top Layer w0.127: v2(77.5,36.381) 77.504,36.385 77.94,36.385 78.74,37.185 U20.1@78.74,37.535
  Top Layer w1: U20.1@78.74,37.535 U20.1@78.74,38.989
  Bottom Layer w0.127: R16.2@40.85,41.7 44.816,41.7 50.724,35.792 76.992,35.792 77.5,36.3 v2(77.5,36.381)
CH8_P: R15.2 U19.1 | length 37.2
  Top Layer w0.127: R15.2@40.85,41.7 46.982,41.7 52.614,36.068 72.193,36.068 73.105,36.98 73.164,36.98 U19.1@73.66,37.475
  Top Layer w1: U19.1@73.66,37.475 U19.1@73.66,37.535 U19.1@73.66,38.989
CH8_uC: R15.1 R16.1 U1.30 | length 18.1
  Top Layer w0.254: U1.30@26.775,37.675 26.775,38.176 30.399,41.8 v1(36,41.8) 39.3,41.8 R15.1@39.4,41.7
  Bottom Layer w0.254: v1(36,41.8) 39.3,41.8 R16.1@39.4,41.7